# Altium PCB LM2576电源电路.PcbDoc
Units mm, origin at the board's own origin, x right, y up, seen from the top; angles counter-clockwise.
Board outline 152.4 x 101.6 mm, 2 copper layers (Top Layer, Bottom Layer); 11 components, 5 nets, 29 pads, 0 vias.
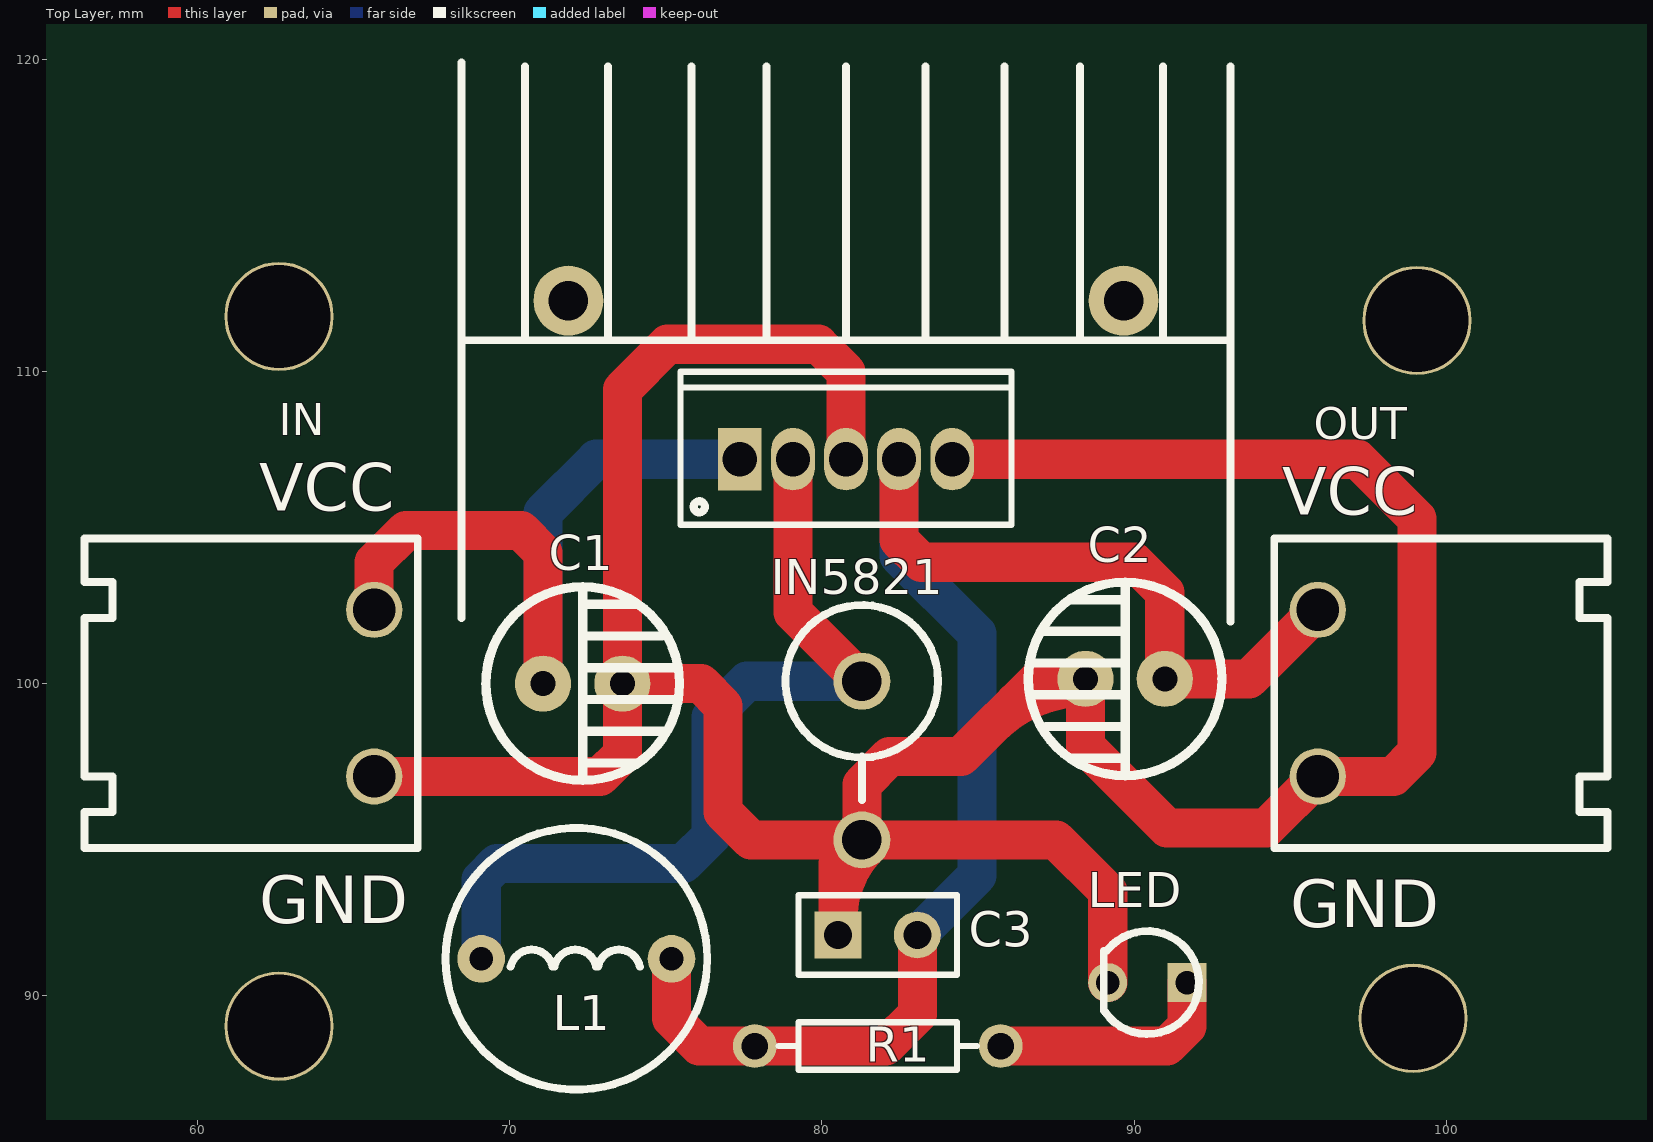
[diagram p0: Top Layer view]
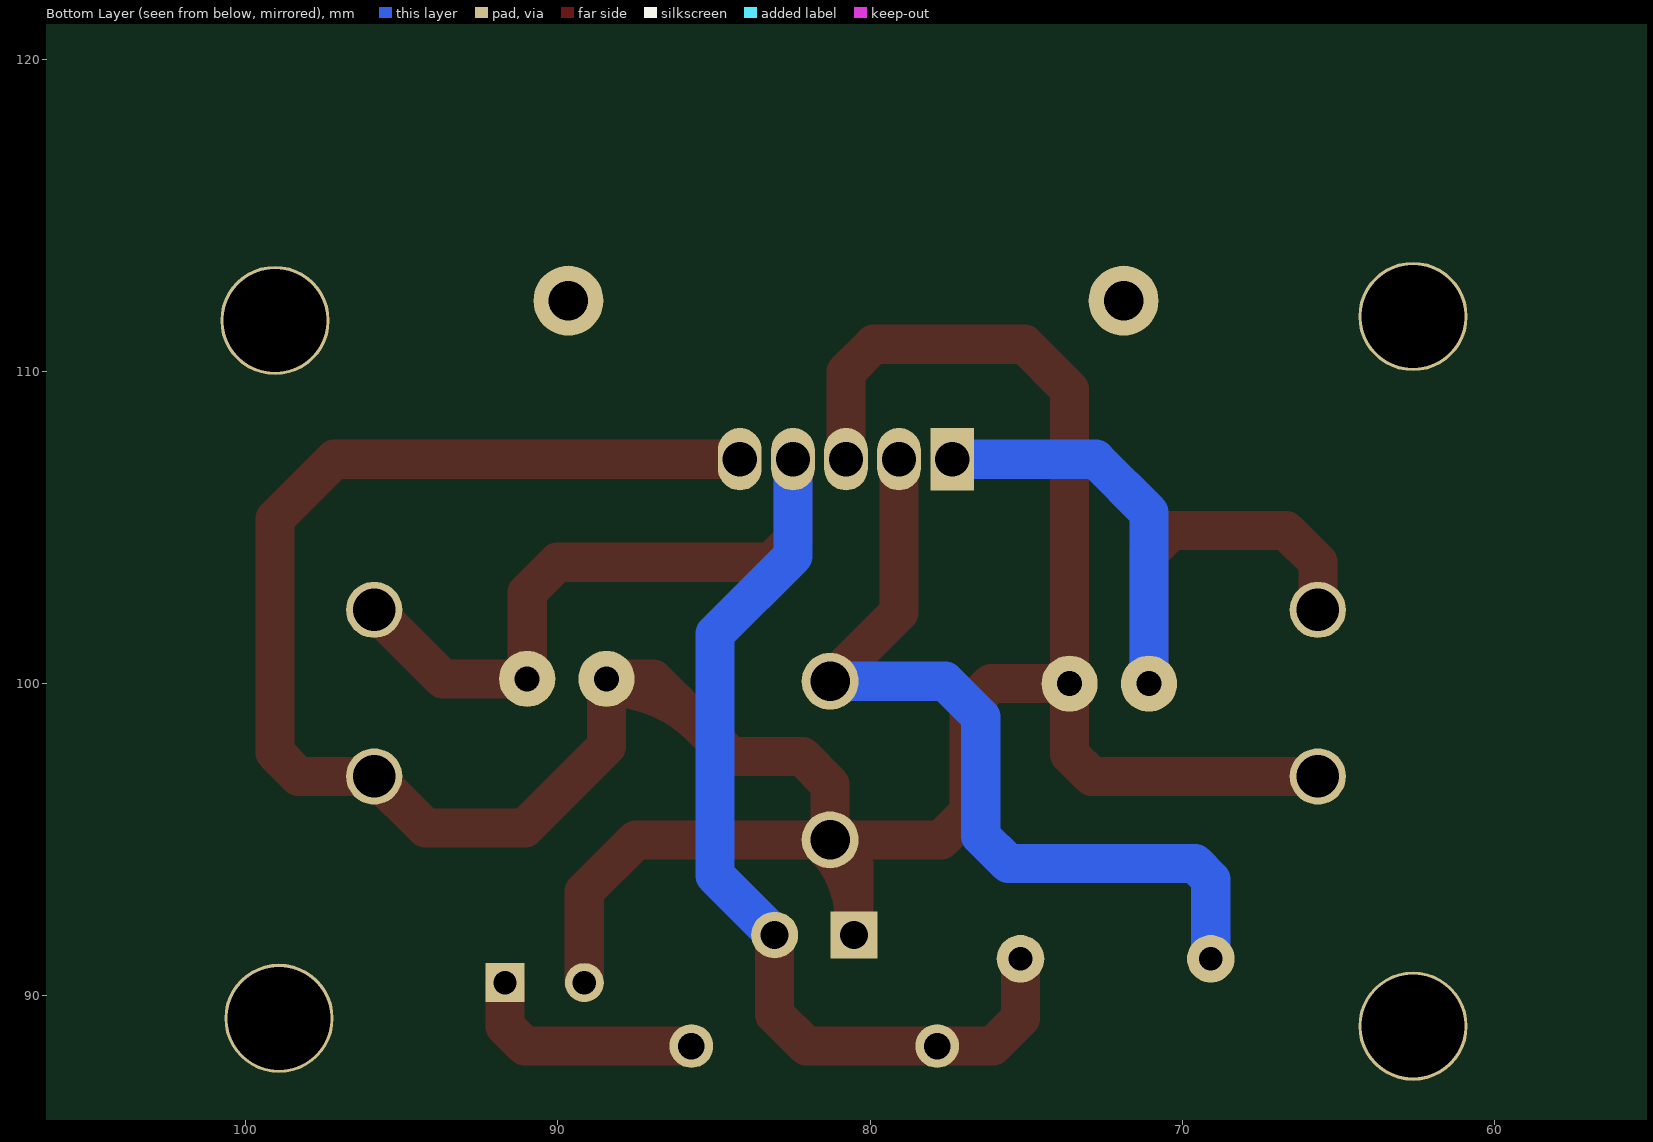
[diagram p1: Bottom Layer view, seen from below]

## Layer stack, top to bottom
Top Layer: signal copper 0.0356
Dielectric: dielectric 0.32, FR-4, Dk 4.8
Bottom Layer: signal copper 0.0356

## Board outline
25.4,25.4 177.8,25.4 177.8,127 25.4,127

## Design rules (kind name [scope] priority, off if disabled: settings)
Clearance [All] p1: gap=0.254
ComponentClearance [All] p1: gap=0.254 collisioncheckmode=3 verticalgap=0.254
PolygonConnect [All] p1: connectstyle=Relief reliefconductorwidth=0.254 reliefentries=4 polygonreliefangle="90 Angle"
RoutingVias [All] p1: holewidth=0.711 width=1.27 viastyle="Through Hole" minholewidth=0.711 minwidth=1.27 maxholewidth=0.711 maxwidth=1.27
SolderMaskExpansion [All] p1: expansion=0.102
TestPointUsage [All] p1: valid=0 allowmultiple=FALSE
Testpoint [All] p1: side=15 testpointundercomponent=TRUE minsize=1.016 maxsize=2.54 preferedsize=1.524 minholesize=0 maxholesize=1.016 preferedholesize=0.813 testpointgrid=0.025 style=1023 order=0-112345678
Width [All] p1: maxlimit=1.254 minlimit=1.254 preferedwidth=1.254
17 further rules are at their usual default settings.

## Classes and differential pairs
component class LM2576电源电路: C1 C2 C3 IN5821 L1 LED R1 VCC

## Components (designator, comment, footprint, x,y, rotation, side; value= is the part's Value field where it differs from the comment)
C1 "DJDR" C-DJ-6 73.66,100.076 r0 top
C2 "DJDR" C-DJ-6 88.392,100.076 r180 top
C3 "CPDR" CPDR 81.788,91.948 r0 top
IN5821 "WY2JG" ZCDZL 83.82,97.536 r0 top
L1 "DG" L_DG 75.184,92.964 r0 top
LED "LED" LED_D 89.916,88.9 r180 top (schematic designator DS1)
R1 "Res" RSE 81.788,88.392 r180 top
U1 "LM2576T5.0" T05A 80.772,107.188 r0 top
VCC "PZ_2" JIKEKE#1 100.076,104.648 r180 top (schematic designator JP2)
VCC "PZ_2" JIKEKE#2 61.468,104.648 r0 top (schematic designator JP1)
? "Comment" YA_20 80.772,104.648 r0 top

## Footprints (in the part's own frame and the unit in brackets; to place one, negate y for a bottom-side part, rotate by r counter-clockwise, add the part's x,y. Pads: shape width x height; smd on the part's side, far side on the other; paste and mask are expansions set on the pad)
C-DJ-6 [mm] "电容6mm"
  round 1.8 hole 0.8: 1(-2.591,-0.076) 2(-0.051,-0.076)
  silkscreen extent -4.42,-3.18 1.78,3.02
CPDR [mm] "瓷片电容"
  rect 1.5x1.5 hole 0.9: 1(-1.27,0)
  round 1.5 hole 0.9: 2(1.27,0)
  silkscreen extent -2.54,-1.27 2.54,1.27
JIKEKE#1 [mm] "可插拔接线端子"
  round 1.8 hole 1.362: 1(4.191,2.286) 2(4.191,7.62)
  silkscreen extent -5.08,0 5.59,9.91
JIKEKE#2 [mm] "可插拔接线端子"
  round 1.8 hole 1.362: 1(4.191,-2.286) 2(4.191,-7.62)
  silkscreen extent -5.08,-9.91 5.59,0
L_DG [mil] "100mH 电感"
  round 60 hole 30: 1(-240,-70) 2(0,-70)
  silkscreen extent -285,-235 45,95
LED_D [mm] "发光二极管_3mm"
  rect 1.25x1.25 hole 0.75: 1(-1.778,-1.524)
  round 1.25 hole 0.75: 2(0.762,-1.524)
  silkscreen extent -2.16,-3.17 0.89,0.13
RSE [mm] "直插电阻1/8W"
  round 1.4 hole 0.85: 1(-3.937,0) 2(3.937,0)
  silkscreen extent -3.17,-0.76 3.17,0.76
T05A [mm] "LM2576"
  rect 1.4x2 hole 1.1: 1(-3.4,0)
  oval 1.4x2 hole 1.1: 2(-1.7,0) 3(0,0) 4(1.7,0) 5(3.4,0)
  silkscreen extent -5.3,-2.1 5.3,2.8
YA_20 [mm] "散热片YA-20"
  round 2.24 hole 1.262: 0(-8.89,7.62) 0(8.89,7.62)
  silkscreen extent -12.32,-2.67 12.32,15.24
ZCDZL [mm] "直插电阻立式插"
  round 1.824 hole 1.262: 1(-2.54,2.54) 2(-2.54,-2.54)
  silkscreen extent -4.98,-1.27 -0.1,4.98

## Part data
C1 C2: "电解电容"
C3: "瓷片电容"
IN5821: "稳压二级管"
L1: "电感"
LED: "发光二极管"
R1: "电阻"
U1: library part LM2576HVT-3.3, "Simple Switcher 3A Step Down Voltage Regulator"
VCC VCC: "排针——2"

## Free pads (board coordinates)
  round 3.5 hole 3.3: 0(62.611,89.027) 0(62.611,111.76) 0(98.933,89.281) 0(99.06,111.633)

## Nets (pads, with @x,y where several pads share a name; then routed paths per layer and width w, separated by ;. In a path a pad name is that pad's centre, name@x,y a point inside that pad or via, vN(x,y) a via of type N, cw(c..) or ccw(c..) an arc to the next point about the centre after c; other vN are vias at no path point)
+5V: C2.1 C3.2 L1.2 R1.2 U1.4 VCC.1@95.885,102.362 | length 50.6
  Top Layer w1.254: L1.2 75.184,89.281 76.073,88.392 82.042,88.392 83.058,89.408 C3.2 ; U1.4 82.472,104.599 83.185,103.886 90.018,103.886 90.983,102.921 C2.1 93.675,100.152 VCC.1@95.885,102.362
  Bottom Layer w1.254: U1.4 82.472,104.091 84.963,101.6 84.963,93.853 C3.2
GND: C1.2 C2.2 C3.1 IN5821.2 LED.2 U1.3 U1.5 VCC.2 | length 115.4
  Top Layer w1.254: VCC.2@65.659,97.028 72.898,97.028 73.609,97.739 73.609,109.423 75.057,110.871 79.883,110.871 80.772,109.982 U1.3 ; C1.2@73.533,99.924 C1.2 76.124,100 76.835,99.289 76.835,95.885 77.724,94.996 87.503,94.996 89.154,93.345 LED.2 ; C3.1 80.518,94.234 IN5821.2 81.28,96.774 82.169,97.663 84.455,97.663 86.944,100.152 C2.2 88.443,97.993 91.059,95.377 94.234,95.377 95.885,97.028 98.298,97.028 99.06,97.79 99.06,105.283 97.155,107.188 U1.5 ; C3.1@80.518,92.468 cw(c83.808,92.468) IN5821.2@81.482,94.794 ; 80.518,93.918 cw(c81.311,93.918) IN5821.2@81.288,94.711 ; 85.418,98.626 cw(c88.443,95.602) C2.2@88.443,99.879 ; 86.195,99.403 cw(c87.665,97.933) C2.2@88.352,99.895
NetDS1_1: LED.1 R1.1 | length 7.6
  Top Layer w1.254: R1.1 91.059,88.392 91.694,89.027 LED.1
NetIN5821_1: IN5821.1 L1.1 U1.2 | length 27.6
  Top Layer w1.254: U1.2 79.072,102.284 IN5821.1
  Bottom Layer w1.254: L1.1 69.088,93.726 69.596,94.234 75.565,94.234 76.454,95.123 76.454,98.933 77.597,100.076 IN5821.1
VCC: C1.1 U1.1 VCC.1@65.659,102.362 | length 24.3
  Top Layer w1.254: VCC.1@65.659,102.362 65.659,103.886 66.675,104.902 70.358,104.902 71.069,104.191 C1.1
  Bottom Layer w1.254: C1.1 71.069,105.486 72.771,107.188 U1.1
pads on no net: ?.0

## Silkscreen, mask and mechanical layers (free items; w line width, h text height)
Top Overlay:
  text "IN" at 62.611,107.95 h1.02
  text "OUT" at 95.758,107.823 h1.02
  text "GND" at 61.976,92.329 h1.52
  text "GND" at 94.996,92.202 h1.52
Mechanical 1:
  lines w0.254: 60.069,84.836 60.073,84.328 ; 61.592,85.099 60.071,84.582 ; 61.598,84.083 60.071,84.582 ; 72.177,84.656 60.071,84.582 ; 89.494,84.762 101.6,84.836 ; 100.073,85.335 101.6,84.836 ; 100.079,84.319 101.6,84.836 ; 101.598,85.09 101.602,84.582 ; 59.944,87.63 59.944,113.284 61.214,114.554 100.457,114.554 101.727,113.284 101.727,87.63 100.457,86.36 61.214,86.36 59.944,87.63
  text "41.5298 (mm)" at 72.437,83.743 h1.52 r0.35